# EAGLE board Webasto (EAGLE 8.1.0)
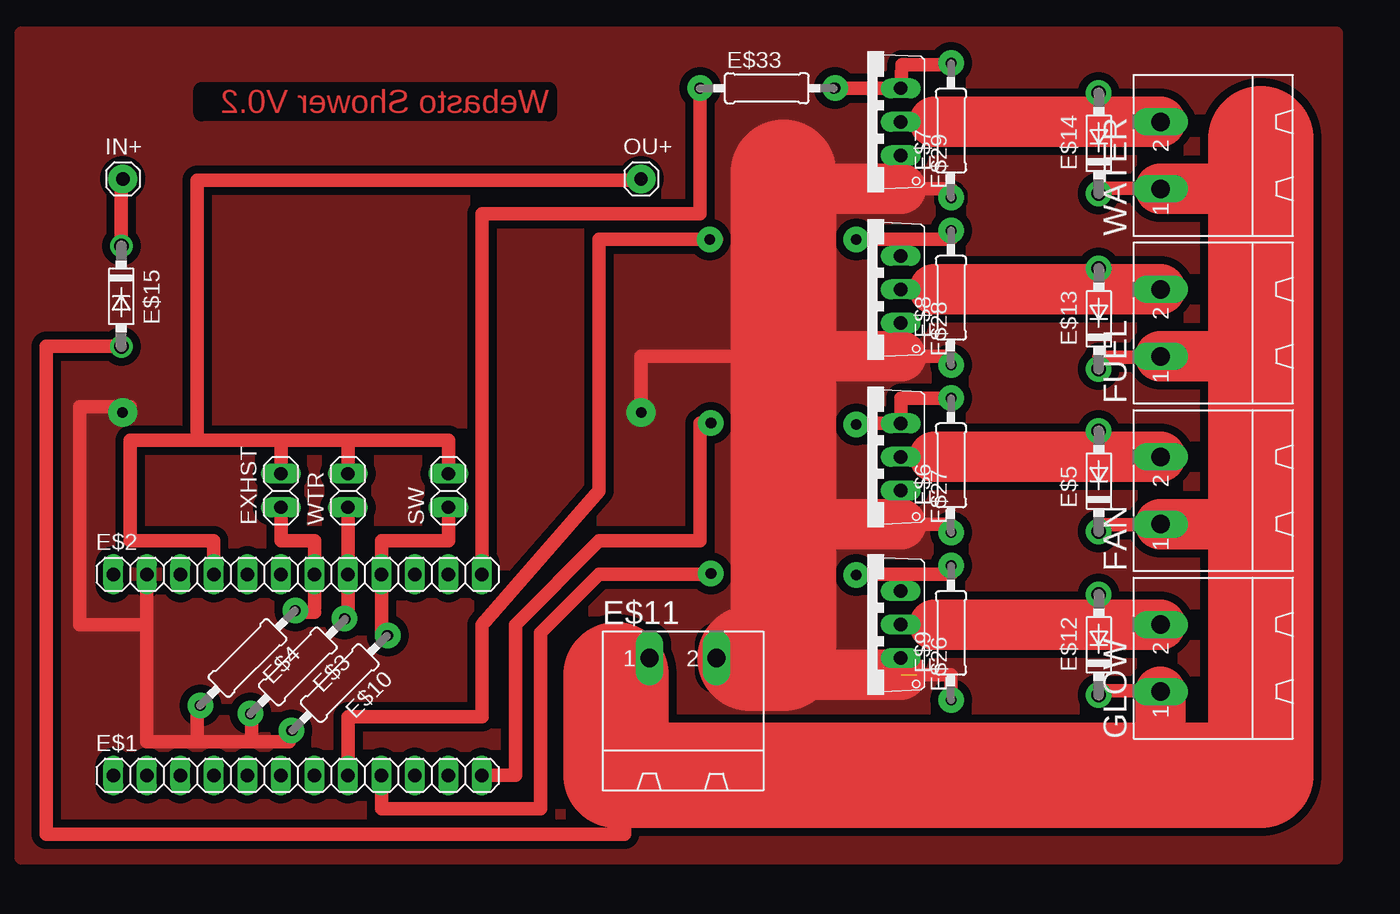
[diagram p0: board, top side]

No outline drawn. Coordinates in mm, seen from the top.
Copper layers (1*16): Top 0.035mm / dielectric 1.5mm / Bottom 0.035mm
Design rules "default": minimum track width 10mil, minimum drill 24mil, track to track 8mil, track to pad 8mil, pad to pad 8mil, via to via 8mil, smd to smd 8mil, copper to edge 40mil, drill to drill 8mil, minimum pad ring 10mil, minimum via ring 8mil, stop-mask expansion 4mil, vias tented up to drill 0mil, thermal gap 10mil

## Footprints (pad centres in the part's own frame; a part is rotated, then mirrored left to right if it is on the bottom)
1X12 = drill 1.016 long: 1 -13.97,0; 2 -11.43,0; 3 -8.89,0; 4 -6.35,0; 5 -3.81,0; 6 -1.27,0; 7 1.27,0; 8 3.81,0; 9 6.35,0; 10 8.89,0; 11 11.43,0; 12 13.97,0
0207/10 = drill 0.813 octagon: 1 -5.08,0; 2 5.08,0
DO41-7.6 = drill 1.1 pad 1.7: A 3.81,0; C -3.81,0
MSTBA2 = drill 1.397 long: 1 -2.54,5.08; 2 2.54,5.08
TO220V = drill 1.016 long: 1 -2.54,-2.54; 2 0,-2.54; 3 2.54,-2.54
1X02 = drill 1.016 long: 1 -1.27,0; 2 1.27,0
1X01 = drill 1.016 octagon: 1 0,0

## Placement (x,y rotation side)
E$1  [1X12]  13.97,0 0 top
E$2  [1X12]  13.97,15.24 0 top
E$3  5k  [0207/10]  13.97,8.26 225 top
E$4  100k  [0207/10]  10.16,8.89 225 top
E$5  1N4007  [DO41-7.6]  74.7,22.3 90 top
E$6  4.7k  [0207/10]  63.5,23.5 90 top
E$7  4.7k  [0207/10]  63.5,48.86 90 top
E$8  4.7k  [0207/10]  63.5,36.2 90 top
E$9  4.7k  [0207/10]  63.5,10.79 90 top
E$10  1k  [0207/10]  17.14,6.99 225 top
E$11  [MSTBA2]  43.18,3.81 0 top
E$12  1N4007  [DO41-7.6]  74.7,9.9 90 top
E$13  1N4007  [DO41-7.6]  74.7,34.6 90 top
E$14  1N4007  [DO41-7.6]  74.7,47.9 90 top
E$15  1N4001  [DO41-7.6]  0.6,36.3 270 top
E$26  [TO220V]  57.15,11.43 90 top
E$27  [TO220V]  57.15,24.13 90 top
E$28  [TO220V]  57.15,36.83 90 top
E$29  [TO220V]  57.15,49.53 90 top
E$33  100  [0207/10]  49.53,52.07 0 top
EXHST  [1X02]  12.7,21.59 90 top
FAN  [MSTBA2]  84.45,21.59 90 top
FUEL  [MSTBA2]  84.45,34.29 90 top
GLOW  [MSTBA2]  84.45,8.89 90 top
IN+  [1X01]  0.71,45.21 0 top
OU+  [1X01]  40,45.21 0 top
SW  [1X02]  25.4,21.59 90 top
WATER  [MSTBA2]  84.45,46.99 90 top
WTR  [1X02]  17.78,21.59 90 top

## Library data of the parts
E$1 E$2 EXHST IN+ OU+ SW WTR = pinhead
E$3 E$4 E$6-E$10 E$33 = eagle-ltspice
E$5 E$12-E$15 = diode
E$11 FAN FUEL GLOW WATER = con-phoenix-508
E$26-E$29 = linear

## Nets
5V+: E$2.4 EXHST.2 SW.2 WTR.2
FAN: E$1.12
FUEL: E$1.8
GLOW: E$1.9
GND: E$2.2 E$9.1
S$2: GLOW.1
S$3: FAN.1
S$4: FUEL.1
S$5: WATER.1
S$10: WATER.2
S$11: FUEL.2
S$12: GLOW.2
S$13: FAN.2
S$18: E$29.3 E$33.2
S$19: E$8.2 E$28.3
S$20: E$27.3
S$21: E$9.2 E$26.3
S$22: E$2.8 WTR.1
S$25: E$2.7 EXHST.1
S$29: E$2.9 SW.1
WATERPUMP: E$2.12 E$33.1

## Tracks (layer width: path | path; a pad name or v marks a point on that pad's centre or on a via)
5V+
  Top 1.016: SW.2 25.4,25.4 17.78,25.4 | 40.44,45.09 6.35,45.09 6.35,25.4 | 6.35,25.4 1.27,25.4 1.27,17.78 7.62,17.78 E$2.4 | 17.78,25.4 12.7,25.4 | 12.7,25.4 6.35,25.4 | WTR.2 17.78,25.4 | EXHST.2 12.7,25.4
12V+
  Top 8: 87,48.26 87,0 38.1,0 38.1,7.62
FAN
  Top 1.016: 45.72,26.67 44.45,26.67 44.45,17.78 36.83,17.78 30.48,11.43 30.48,0 E$1.12
FUEL
  Top 1.016: E$1.8 17.78,4.45 27.94,4.45 27.94,11.43 36.83,21.59 36.83,40.64 45.72,40.64
GLOW
  Top 1.016: 45.72,15.24 36.83,15.24 32.38,10.79 32.38,-2.54 20.32,-2.54 E$1.9
GND  (via drill 0.8 pad 1.93, 0.8 pad 2.18)  (1 unrouted)
  Top 1.016: 63.5,31.11 63.5,31.75 59.69,31.75 | 40.01,27.3 40.01,31.75 48.9,31.75 | 1.27,27.94 -2.54,27.94 -2.54,11.43 2.54,11.43 | 13.65,3.17 13.34,2.54 10.48,2.54 | 10.48,4.76 10.48,2.54 | E$2.2 2.54,11.43 | 10.48,2.54 6.35,2.54 | 6.35,5.08 6.35,2.54 | 6.35,2.54 2.54,2.54 2.54,11.43 | v63.5,43.8 63.5,44.45 59.69,44.45 | 63.5,18.41 63.5,19.05 58.42,19.05 | 60.96,7.62 63.5,7.62 E$9.1
  Top 3.81: 59.69,31.75 50.8,31.75 | 59.69,44.45 53.34,44.45 | 59.69,19.05 58.42,19.05 52.07,19.05 | 59.69,7.62 50.8,7.62
  Top 8: 50.8,45.72 50.8,31.75 50.8,8.89 48.26,8.89
  other vias: 40,27.5 0.7,27.5
  pour Top (isolate 0.61): -6.99,-6.25 92.71,-6.25 92.71,56.24 -6.99,56.24
S$1
  Top 1.016: 15.24,12.38 13.97,12.38
S$2
  Top 3.81: GLOW.1 79.38,3.81
S$3
  Top 3.81: FAN.1 85.72,19.05
S$4
  Top 3.81: FUEL.1 85.72,31.75
S$5
  Top 3.81: WATER.1 85.72,44.45
S$6
  Top 1.016: 0.47,32.52 -5.08,32.52 -5.08,-4.45 38.73,-4.45 38.73,-3.17
S$7  (via drill 0.8 pad 1.93)
  other vias: 6.6,5.3
S$8  (via drill 0.8 pad 1.93)
  other vias: 10.4,4.7
S$9  (via drill 0.8 pad 1.93)
  other vias: 13.5,3.4
S$10
  Top 3.81: 62.23,49.53 WATER.2
S$11
  Top 3.81: 62.23,36.83 FUEL.2
S$12
  Top 3.81: 62.23,11.43 GLOW.2
S$13
  Top 3.81: 62.23,24.13 FAN.2
S$14  (via drill 0.8 pad 1.93)
  Top 1.016: 79.2,6.4 74.7,6.4 v74.7,6.1
S$15  (via drill 0.8 pad 1.93)
  other vias: 20.8,10.6
S$16  (via drill 0.8 pad 1.93)
  other vias: 17.5,11.9
S$17  (via drill 0.8 pad 1.93)
  other vias: 13.8,12.5
S$18
  Top 1.016: 63.6,53.84 59.79,53.84 E$29.3 E$33.2
S$19
  Top 1.016: 59.69,40.64 63.5,40.64 E$8.2 | E$28.3 59.69,40.64 | 59.69,40.64 55.88,40.64
S$20
  Top 1.016: 63.5,28.57 59.69,28.57 E$27.3 55.88,26.67
S$21
  Top 1.016: 59.69,15.24 63.5,15.24 E$9.2 | E$26.3 59.69,15.24 | 59.69,15.24 55.88,15.24
S$22
  Top 1.016: WTR.1 E$2.8 17.78,11.75
S$23  (via drill 0.8 pad 1.93)
  other vias: 63.5,15.9
S$24  (via drill 0.8 pad 1.93)
  other vias: 63.5,18.4
S$25
  Top 1.016: EXHST.1 12.7,17.78 15.24,17.78 E$2.7 15.24,12.7
S$26  (via drill 0.8 pad 1.93)
  other vias: 63.5,5.7
S$27  (via drill 0.8 pad 1.93)
  other vias: 63.5,28.6
S$28  (via drill 0.8 pad 1.93)
  other vias: 63.5,31.1
S$29
  Top 1.016: SW.1 25.4,17.78 20.32,17.78 E$2.9 20.32,10.48 20.95,10.48
S$30  (via drill 0.8 pad 1.93)
  other vias: 63.5,41.3
S$31  (via drill 0.8 pad 1.93)
  other vias: 63.5,54
S$32  (via drill 0.8 pad 1.93)
  other vias: 44.5,52.1
S$33  (via drill 0.8 pad 1.93)
  other vias: 54.7,52.1
S$34  (via drill 0.8 pad 1.93)
  Top 1.016: 74.8,13.8 74.7,13.8 v74.7,13.7 74.7,12.4
S$35  (via drill 0.8 pad 1.93)
  Top 1.016: 79.4,19.1 79.4,19 74.7,19 v74.7,18.5 74.7,18.4
S$36  (via drill 0.8 pad 2.18)
  other vias: 0.7,45.2
S$37  (via drill 0.8 pad 2.18)
  other vias: 40,45.2
S$38  (via drill 0.8 pad 1.93)
  other vias: 56.3,40.6
S$39  (via drill 0.8 pad 1.93)
  other vias: 45.2,40.6
S$40  (via drill 0.8 pad 1.93)
  other vias: 45.3,26.7
S$41  (via drill 0.8 pad 1.93)
  other vias: 56.3,26.6
S$42  (via drill 0.8 pad 1.93)
  other vias: 56.3,15.2
S$43  (via drill 0.8 pad 1.93)
  other vias: 45.3,15.3
S$44  (via drill 0.8 pad 1.93)
  Top 1.016: 74.7,26.3 v74.7,26.1 74.7,25.3
S$45  (via drill 0.8 pad 1.93)
  Top 1.016: 79.4,31.7 74.7,31.7 v74.7,30.8
S$46  (via drill 0.8 pad 1.93)
  Top 1.016: 74.7,38.6 v74.7,38.4 74.7,37.5
S$47  (via drill 0.8 pad 1.93)
  Top 1.016: 79.6,49.5 74.7,49.5 v74.7,51.7
S$48  (via drill 0.8 pad 1.93)
  Top 1.016: 79.4,44.5 74.7,44.5 v74.7,44.1
S$49  (1 unrouted)
S$50
  Top 1.016: 0.6,40 0.6,45.5
WATERPUMP
  Top 1.016: E$33.1 44.45,42.55 27.94,42.55 E$2.12

## Text on the board
Top: Webasto Shower V0.2